# EAGLE board ESP8266BMESensor (EAGLE 8.6.3)
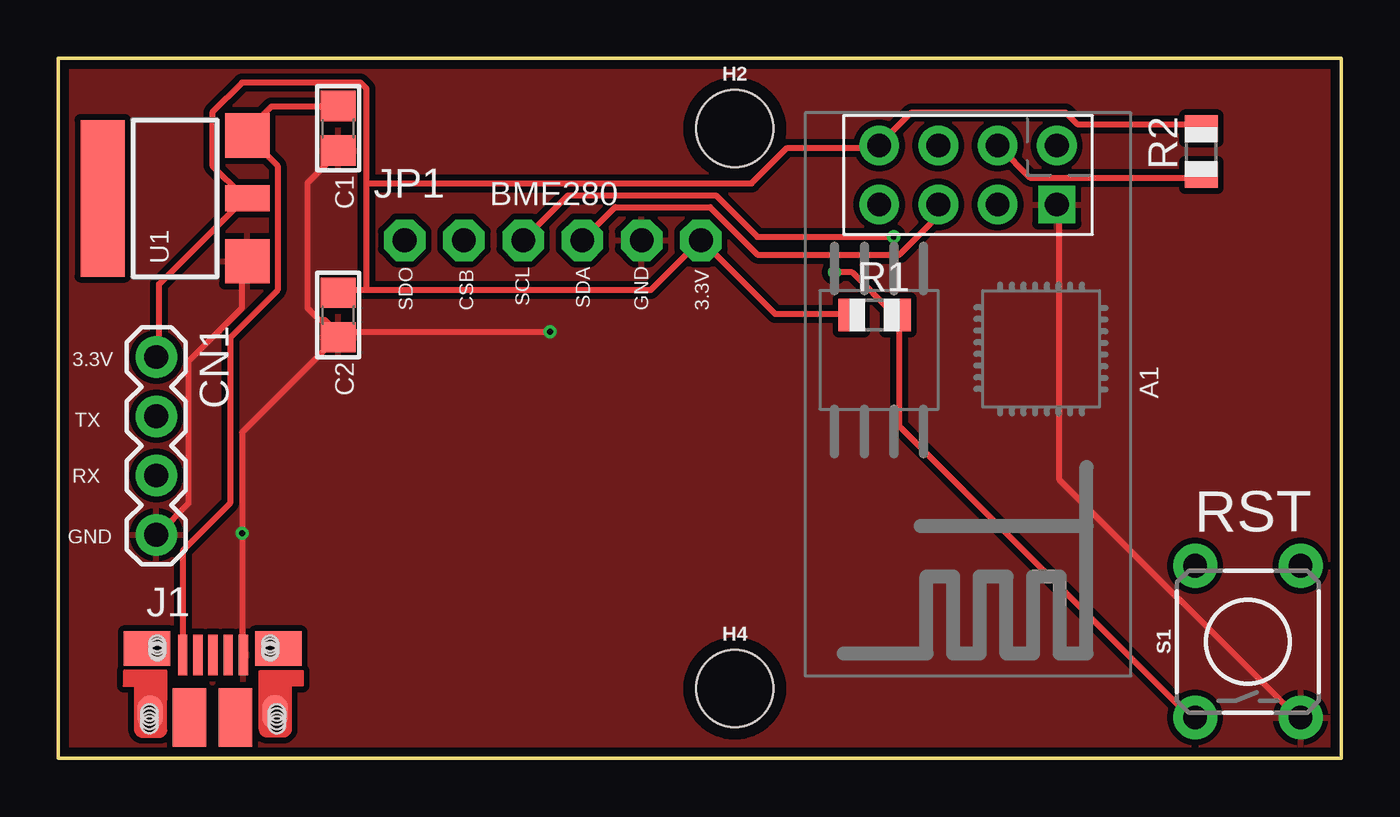
[diagram p0: board, top side]
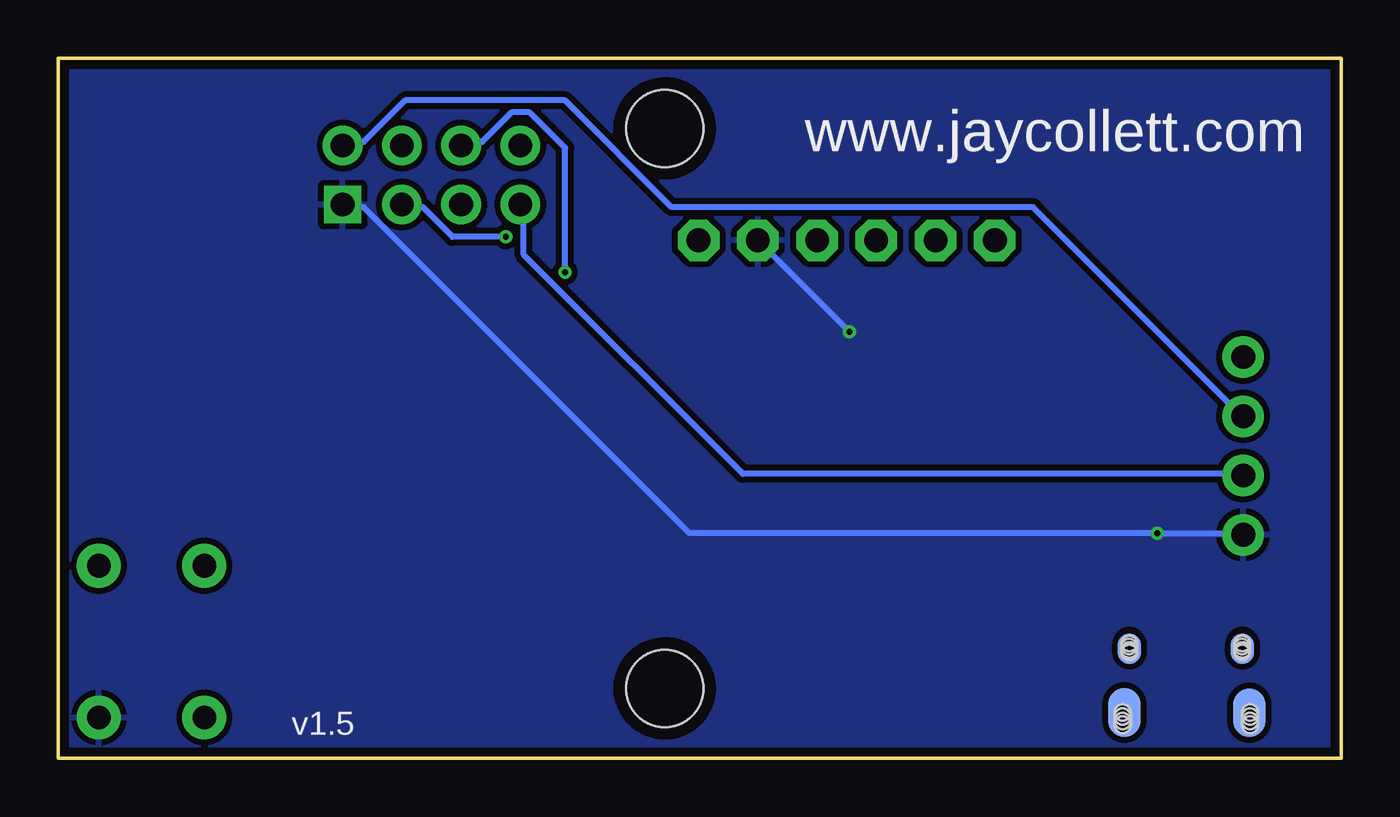
[diagram p1: board, bottom side, seen from below]

Size 55 x 30 mm. Coordinates in mm from the lower left corner, seen from the top.
Outline: 0,0 55,0 55,30 0,30 0,0
Copper layers (1*16): Top 0.035559375mm / dielectric 1.6mm / Bottom 0.035559375mm
Design rules "oshpark-2layer-auto-routing *": minimum track width 10mil, minimum drill 10mil, track to track 10mil, track to pad 8mil, pad to pad 8mil, via to via 8mil, smd to smd 6mil, copper to edge 15mil, drill to drill 6mil, minimum pad ring 6mil, minimum via ring 6mil, stop-mask expansion 2.5mil, vias tented up to drill 13mil, thermal gap 10mil

## Footprints (pad centres in the part's own frame; a part is rotated, then mirrored left to right if it is on the bottom)
ESP8266_ESP-01_NO-SILKSCREEN = drill 1.016 pad 1.7: 3V3 -1.27,-3.81; EN/CH_PD -1.27,1.27; GPIO0 1.27,-1.27; GPIO2 1.27,1.27; RST -1.27,-1.27; RX 1.27,-3.81; TX -1.27,3.81 | drill 1.016 pad 1.6 square: GND 1.27,3.81
0805 = smd 1.3 x 1.5: 1 -0.95,0; 2 0.95,0
1X04-BIG = drill 1.016 pad 1.778: 1 0,0; 2 2.54,0; 3 5.08,0; 4 7.62,0
STAND-OFF = hole 3.302: 0,0
USB-MICROB-PTH = smd 0.4 x 1.75: D+ 0.031,1.331; D- -0.619,1.331; GND 1.331,1.331; ID 0.681,1.331; VBUS -1.269,1.331 | smd 1.4 x 2.1 bottom: P$1 2.701,-1.142; P$3 -2.659,-1.144 | smd 1 x 1.3: P$2 2.487,1.594; P$6 -2.368,1.604 | smd 1 x 1.3 bottom: P$4 -2.368,1.604; P$10 2.481,1.598 | smd 1.1 x 1.5: P$8 2.701,-1.142; P$12 -2.659,-1.144 | smd 2 x 1.46: SHEILD2 2.831,1.606; SHIELD -2.794,1.606 | smd 1.425 x 2.5: SHIELD3 -0.979,-1.349; SHIELD4 0.996,-1.352 | hole 0.7: -2.693,-1.134; -2.693,-1.3; -2.694,-1.499; -2.694,-1.664; 2.768,-1.134; 2.767,-1.303; 2.766,-1.496; 2.766,-1.664 | hole 0.66: -2.359,1.821; -2.349,1.691; -2.359,1.541; -2.354,1.432; 2.481,1.821; 2.491,1.691; 2.481,1.541; 2.486,1.432
1X06-CLEANBIG = drill 1.016 pad 1.778 octagon: 1 -6.35,0; 2 -3.81,0; 3 -1.27,0; 4 1.27,0; 5 3.81,0; 6 6.35,0
R0805 = smd 1.1 x 1.4: 1 -1,0; 2 1,0
TACTILE_SWITCH_PTH_6.0MM = drill 1.016 pad 1.88: 1 -3.251,2.261; 2 3.251,2.261; 3 -3.251,-2.261; 4 3.251,-2.261
SOT223-W = smd 1.9 x 1.9: 1 -2.7,-3.1; 3 2.7,-3.1 | smd 1.1 x 1.9: 2 0,-3.1 | smd 6.7 x 1.9: 4 0,3.1

## Placement (x,y rotation side)
A1  [ESP8266_ESP-01_NO-SILKSCREEN]  39,25 270 top
C1  1uF  [0805]  12,27 270 top
C2  1uF  [0805]  12,19 270 top
CN1  1X4-BIG  [1X04-BIG]  4.2,17.2 270 top
FRAME1  FRAME-LETTERNO_PACKAGE  [DUMMY]  35,1 0 top
H2  STAND-OFF  [STAND-OFF]  29,27 0 top
H4  STAND-OFF  [STAND-OFF]  29,3 0 top
J1  AMP FCI 10103594-0001LF  [USB-MICROB-PTH]  6.6,3.1 0 top
JP1  [1X06-CLEANBIG]  21.2,22.2 0 top
R1  10k  [R0805]  35,19 0 top
R2  [R0805]  49,26 90 top
S1  MOMENTARY-SWITCH-SPST-PTH-6.0MM  [TACTILE_SWITCH_PTH_6.0MM]  51,5 90 top
U1  [SOT223-W]  5,24 90 top

## Library data of the parts
A1 = LuisLab-Boards
C1 C2 U1 = microbuilder
CN1 JP1 R1 R2 = adafruit
FRAME1 = SparkFun-Aesthetics; DESIGNER: Nobody; VERSION: v01
H2 H4 = SparkFun-Hardware
J1 = SparkFun-Connectors; PROD_ID: CONN-13711
S1 = SparkFun-Switches; PROD_ID: SWCH-08441; SF_SKU: COM-00097

## Nets
3.3V: A1.3V3 C2.1 CN1.1 JP1.6 R1.1 R2.2 U1.2
+5V: C1.1 J1.VBUS U1.3
CSB: JP1.2
EN/CHPD: A1.EN/CH_PD R2.1
GND: A1.GND C1.2 C2.2 CN1.4 J1.GND JP1.5 S1.3 U1.1
RST: A1.RST R1.2 S1.1
RX: A1.RX CN1.3
SCL: A1.GPIO2 JP1.3
SDA: A1.GPIO0 JP1.4
SDO: JP1.1
TX: A1.TX CN1.2

## Tracks (layer width: path | path; a pad name or v marks a point on that pad's centre or on a via)
3.3V
  Top 0.254: R2.2 48.77,27.18 43.69,27.18 43.18,27.69 36.58,27.69 35.31,26.42 A1.3V3 35.05,26.16 31.24,26.16 29.72,24.64 13.21,24.64 | CN1.1 4.32,17.27 4.32,20.32 7.87,23.88 U1.2 7.87,24.13 6.6,25.4 6.6,27.69 7.87,28.96 12.95,28.96 13.21,28.7 13.21,24.64 | R1.1 33.78,19.05 30.73,19.05 27.69,22.1 JP1.6 27.43,22.1 25.4,20.07 13.21,20.07 | 13.21,20.07 12.19,20.07 C2.1 | 13.21,20.07 13.21,24.64
+5V
  Top 0.254: C1.1 11.94,27.94 9.14,27.94 8.13,26.92 U1.3 8.13,26.67 9.4,25.4 9.4,20.07 7.37,18.03 7.37,10.92 5.33,8.89 5.33,4.57 J1.VBUS
EN/CHPD
  Top 0.254: R2.1 48.77,24.89 41.66,24.89 40.39,26.16 A1.EN/CH_PD
GND  (via drill 0.25)
  Top 0.254: A1.GND 42.93,23.62 42.93,11.94 53.09,1.78 S1.3 | U1.1 7.87,21.08 7.87,19.3 5.59,17.02 5.59,10.92 4.32,9.65 CN1.4 | C2.2 11.94,18.29 11.43,18.8 11.18,18.8 10.67,19.3 10.67,24.64 11.94,25.91 C1.2 | J1.GND 7.87,4.57 v7.87,9.65 7.87,13.97 11.94,18.03 C2.2 | v21.08,18.29 12.19,18.29 C2.2
  Bottom 0.254: v21.08,18.29 24.89,22.1 JP1.5 | CN1.4 4.32,9.65 v7.87,9.65 27.94,9.65 41.91,23.62 42.67,23.62 A1.GND
  pour Top (isolate 0.24): 0,30 55,30 55,0 0,0
  pour Bottom (isolate 0.24): 0,30 55,30 55,0 0,0
RST  (via drill 0.25)
  Top 0.254: S1.1 48.51,1.78 36.07,14.22 36.07,18.8 R1.2 35.81,19.05 34.04,20.83 v33.27,20.83
  Bottom 0.254: v33.27,20.83 33.27,26.16 34.8,27.69 35.56,27.69 36.83,26.42 37.59,26.42 A1.RST
RX
  Bottom 0.254: A1.RX 35.05,23.62 35.05,21.59 25.65,12.19 4.32,12.19 CN1.3
SCL  (via drill 0.25)
  Top 0.254: v35.81,22.35 29.97,22.35 28.19,24.13 21.84,24.13 20.07,22.35 JP1.3
  Bottom 0.254: v35.81,22.35 38.1,22.35 39.37,23.62 40.13,23.62 A1.GPIO2
SDA
  Top 0.254: A1.GPIO0 37.59,23.62 37.59,23.11 36.07,21.59 29.97,21.59 27.94,23.62 23.88,23.62 22.61,22.35 JP1.4
TX
  Bottom 0.254: A1.TX 42.67,26.42 41.91,26.42 40.13,28.19 33.27,28.19 28.7,23.62 13.21,23.62 4.32,14.73 CN1.2

## Text on the board
tPlace: BME280 | SDO | CSB | SCL | SDA | GND | 3.3V | 3.3V | TX | RX | RST | GND
bPlace: www.jaycollett.com | v1.5